# Altium PCB 20K Control Board V1.1.PcbDoc (part 16 of 24)
Units mm, origin at the board's own origin, x right, y up, seen from the top; angles counter-clockwise.
Board outline 132 x 260 mm, 4 copper layers (Top Layer, GND, VCC, Bottom Layer); 1384 components, 779 nets, 4515 pads, 1774 vias.
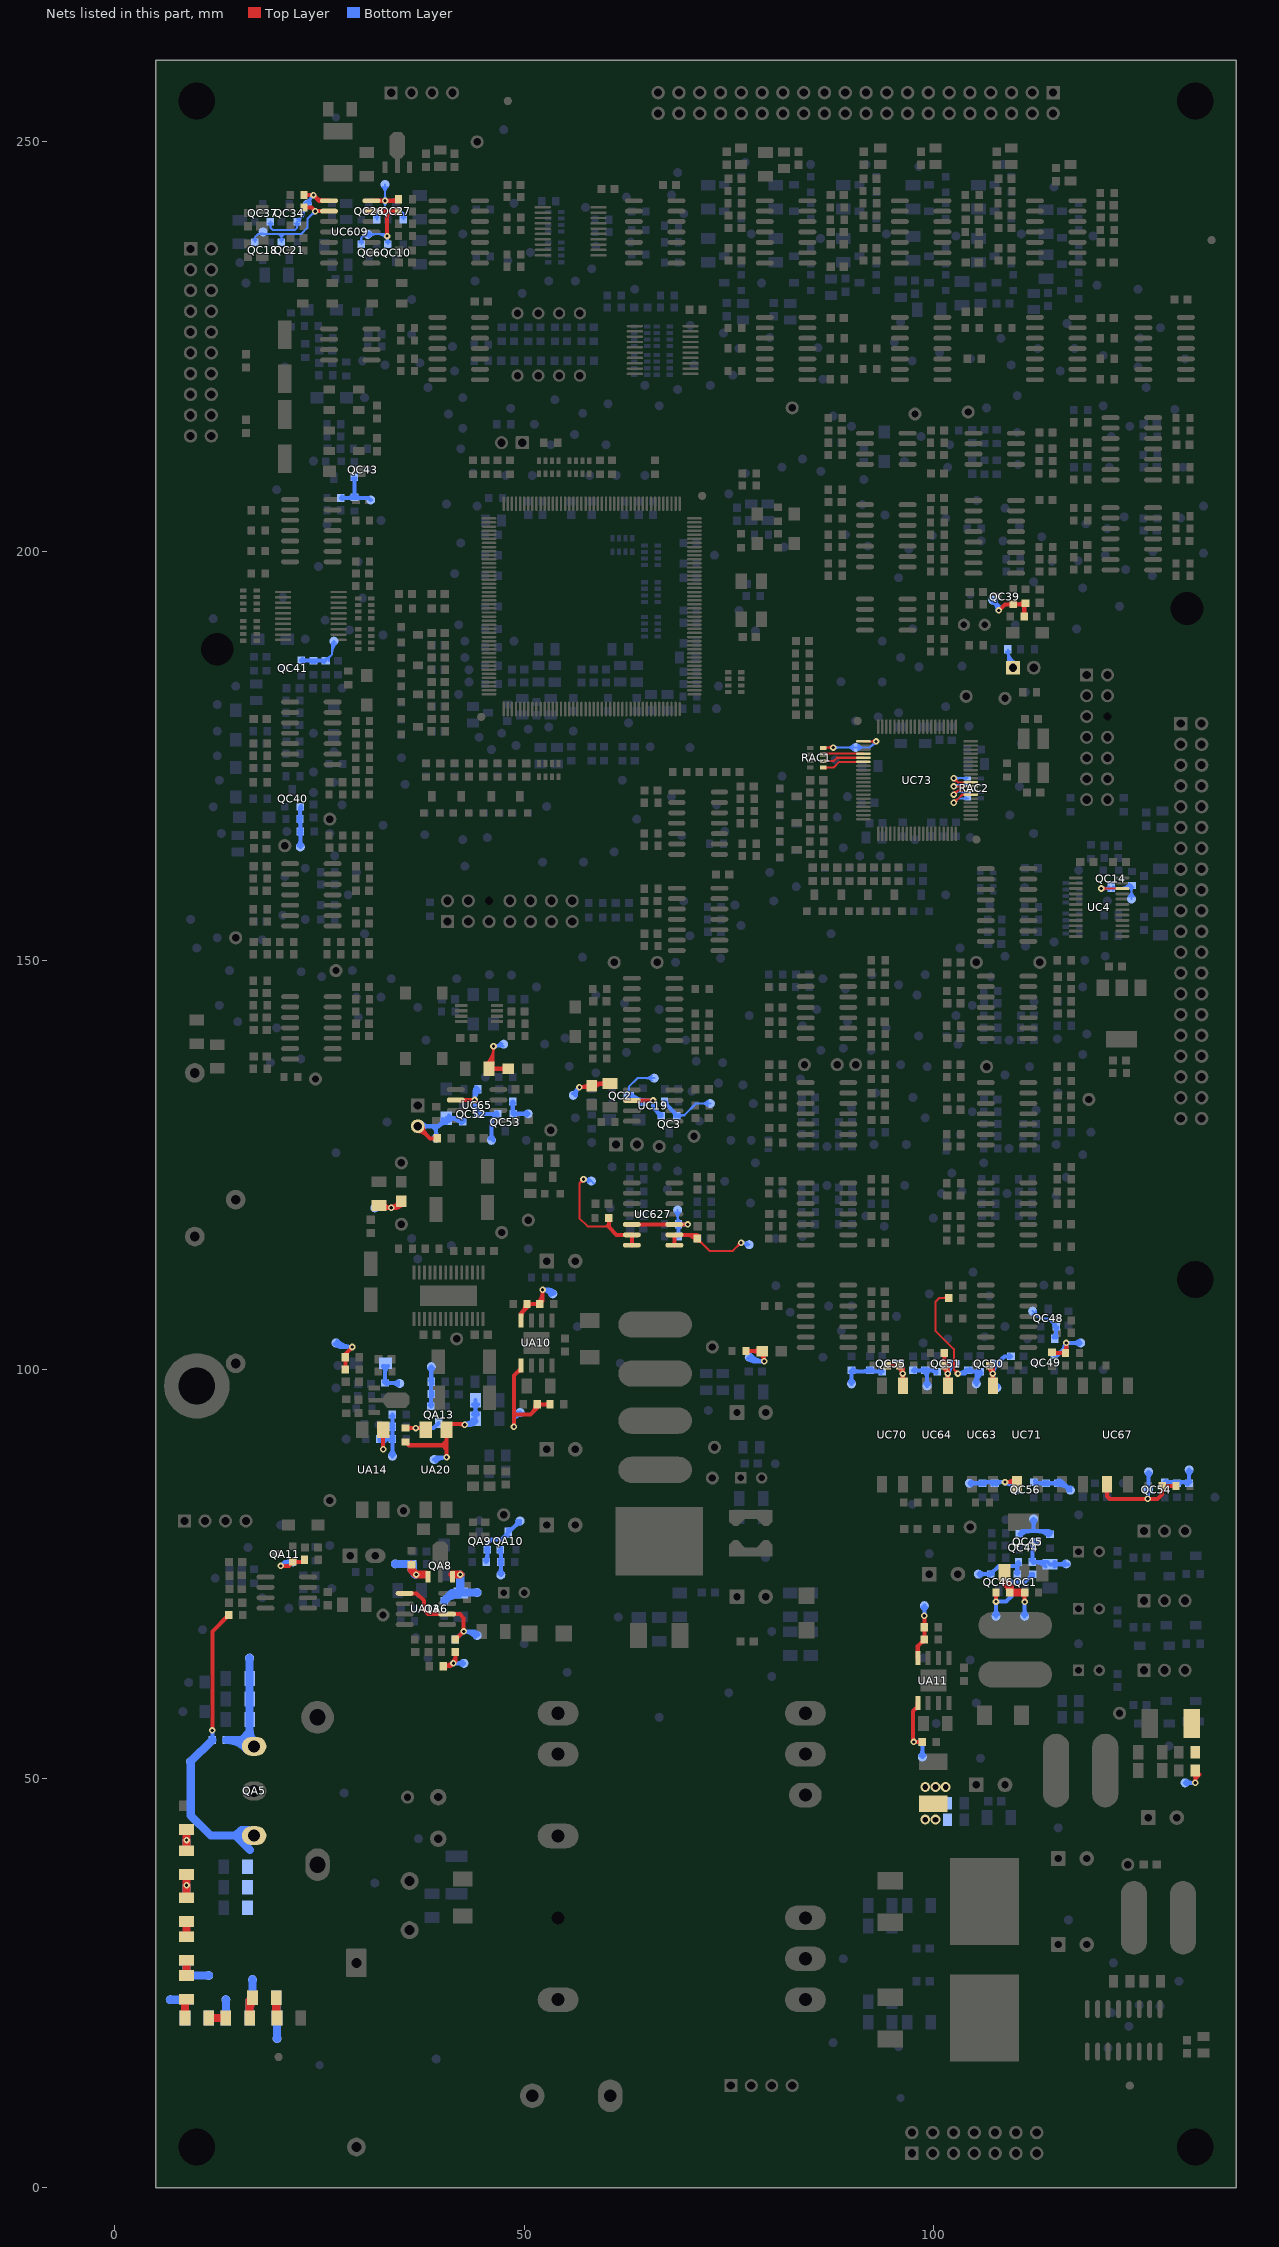
[diagram p18: the nets of this part, all layers, seen from the top]

## Via types
v1: diameter 0.8, hole 0.4, Top Layer to Bottom Layer, tented both sides, 1354 vias
v2: diameter 1.2, hole 0.7, Top Layer to Bottom Layer, 261 vias
v3: diameter 0.8, hole 0.4, Top Layer to Bottom Layer, 58 vias
v4: diameter 1.2, hole 0.7, Top Layer to Bottom Layer, tented top, 58 vias
v5: diameter 0.8, hole 0.4, Top Layer to Bottom Layer, tented top, 22 vias
v6: diameter 1.2, hole 0.7, Top Layer to Bottom Layer, tented both sides, 13 vias
v7: diameter 1.2, hole 0.7, Top Layer to Bottom Layer, tented bottom, 8 vias

## Nets (pads, with @x,y where several pads share a name; then routed paths per layer and width w, separated by ;. In a path a pad name is that pad's centre, name@x,y a point inside that pad or via, vN(x,y) a via of type N, cw(c..) or ccw(c..) an arc to the next point about the centre after c; other vN are vias at no path point) (continued)
NetDC58_2: DC58.2 JC1.2 pad.0 QC52.1 RC614.2 | length 23.4
  Top Layer w0.5: JC1.2@37,129.13 cw(c37,127.681) 38.024,128.706 cw(c39.049,129.73) JC1.2@37.6,129.73 ; JC1.2@37,129.73 38.48,128.25 RC614.2@39.4,128.25 ; RC614.2@39.259,128.109 ccw(c38.917,127.767) 38.917,128.25 ccw(c38.917,128.733) RC614.2@39.259,128.391
  Bottom Layer w0.5: JC1.2@37,129.73 39.25,129.73 ; JC1.2@37.424,129.306 cw(c38.449,128.281) 38.449,129.73 cw(c38.449,131.179) JC1.2@37.424,130.154 ; 38.77,129.73 39.25,129.25 ; pad.0@39.038,128.462 ccw(c38.526,128.974) 39.25,128.974 ccw(c39.974,128.974) pad.0@39.462,128.462 ; pad.0@39.25,128.25 39.25,129.25 ; 39.561,129.761 cw(c40.5,128.822) DC58.2@40.5,130.15 ; DC58.2@39.803,130.003 ccw(c39.205,130.6) DC58.2@40.05,130.6 ; DC58.2@40.818,130.382 cw(c41.586,129.614) 41.586,130.7 cw(c41.586,131.786) DC58.2@40.818,131.018 ; DC58.2@40.913,130.7 cw(c40.913,128.663) QC52.1@42.353,130.103 ; QC52.1@42.12,130.7 cw(c42.12,129.87) QC52.1@42.707,130.457 ; QC52.1@42.5,130.25 42.05,130.7 DC58.2@40.5,130.7 39.53,129.73 39.25,129.73 ; 39.25,129.25 39.25,129.73
NetFA2_2: FA2.2 LA11.2 LA18.2 pad.ICT@130.75,49.5 | length 6.1
  Top Layer w0.5: LA11.2@131.789,50.595 cw(c131.24,50.046) 132.016,50.046 cw(c132.792,50.046) LA11.2@132.243,50.595 ; v1@131.894,49.606 ccw(c131.599,49.901) 132.016,49.901 ; v1@132.016,49.516 132.016,50 ; LA11.2@132.016,51 132.016,50 ; LA11.2@132.516,50.5 132.016,50
  Bottom Layer w0.5: pad.ICT@130.75,49.5 v1(132,49.5) ; pad.ICT@130.962,49.288 cw(c131.474,48.776) 131.474,49.5 cw(c131.474,50.224) pad.ICT@130.962,49.712
NetFA3_2: FA3.2 LA15.2 LA20.2 pad.3@99.5,47.25
  other v2: 99,45 100.25,45 99,49 100.25,49 101.5,49
NetJC2_1: JC2.1 RC629.2 | length 11.2
  Bottom Layer w0.25: RC629.2@108.87,187.72 cw(c108.315,187.165) 109.1,187.165 cw(c109.885,187.165) RC629.2@109.33,187.72 ; JC2.1@109.1,186.339 ccw(c110.042,186.339) JC2.1@109.601,185.507 ; 109.1,186.755 ccw(c110.262,186.755) JC2.1@109.718,185.728 ; 109.1,187.17 ccw(c110.481,187.17) JC2.1@109.835,185.949 ; RC629.2@109.1,187.585 ccw(c110.701,187.585) JC2.1@109.952,186.17 ; JC2.1@109.73,185.75 109.1,186.38 RC629.2@109.1,188 ccw(c110.92,188) JC2.1@110.069,186.391
NetLDM1_2: LDM1.2 pad.ICT@56,133.5 RC204.2 | length 10
  Top Layer w0.5: v1(56.75,134.5) 57.75,134.5 57.925,134.675 LDM1.2@58.25,134.675 ; v1@56.983,134.5 ccw(c56.983,135.892) LDM1.2@57.967,134.908 ; 57.586,134.5 cw(c57.586,133.961) LDM1.2@57.967,134.342 ; LDM1.2@58.525,134.95 RC204.2@60.5,134.95 ; LDM1.2@58.533,134.442 cw(c59.759,133.216) RC204.2@59.759,134.95 ; RC204.2@59.967,134.667 ccw(c59.284,133.984) 59.284,134.95 ccw(c59.284,135.916) RC204.2@59.967,135.233
  Bottom Layer w0.5: pad.ICT@56,133.75 v1(56.75,134.5) ; pad.ICT@56.3,133.5 cw(c57.628,133.5) v1@56.689,134.439
NetLDM2_2: LDM2.2 pad.ICT@31.75,119.75 RC501.2 | length 12.3
  Top Layer w0.5: RC501.2@32.5,120.05 32.8,119.75 v1(33.75,119.75) ; RC501.2@32.841,120.259 ccw(c33.75,120.816) v1(33.75,119.75) ; v1@33.75,119.9 ccw(c33.75,121.288) LDM2.2@34.732,120.307 ; 34.232,119.807 cw(c35,119.039) LDM2.2@35,120.125 ; 34.282,119.75 ccw(c34.282,120.569) LDM2.2@35.1,120.519 ; LDM2.2@34.353,119.928 ccw(c33.755,120.525) LDM2.2@34.6,120.525 ; LDM2.2@34.601,120.55 cw(c33.75,120.602) v1(33.75,119.75) ; LDM2.2@35,120.575 34.175,119.75 v1(33.75,119.75)
  Bottom Layer w0.5: pad.ICT@31.75,119.75 v1(33.75,119.75) ; pad.ICT@31.962,119.538 cw(c32.474,119.026) 32.474,119.75 cw(c32.474,120.474) pad.ICT@31.962,119.962
NetLDM3_2: LDM3.2 pad.ICT@47.5,139.75 RC504.2 | length 20.1
  Top Layer w0.25: RC504.2@45.339,137.381 ccw(c43.331,139.5) 46.25,139.5 46.25,137.3 RC504.2@45.7,136.75 ; RC504.2@45.511,137.2 ccw(c43.882,138.918) 46.25,138.918 ; RC504.2@45.683,137.018 ccw(c44.433,138.337) 46.25,138.337 ; RC504.2@45.855,136.837 ccw(c44.984,137.756) 46.25,137.756 ; v1@46.056,139.306 cw(c45.586,138.836) 46.25,138.836 cw(c46.914,138.836) v1@46.444,139.306
  Top Layer w0.5: RC504.2@45.7,136.75 LDM3.2@47.825,136.75 ; RC504.2@45.983,136.467 cw(c46.666,135.784) 46.666,136.75 cw(c46.666,137.716) RC504.2@45.983,137.033 ; LDM3.2@47.742,136.467 ccw(c47.059,135.784) 47.059,136.75 ccw(c47.059,137.716) LDM3.2@47.742,137.033
  Bottom Layer w0.25: v1@46.444,139.306 cw(c46.914,138.836) 46.914,139.5 cw(c46.914,140.164) v1@46.444,139.694 ; 46.713,139.5 ccw(c46.713,140.266) pad.ICT@47.354,139.846 ; pad.ICT@47.145,139.983 cw(c46.25,140.57) v1(46.25,139.5) pad.ICT@47.5,139.5
NetLEDA1_1: LEDA1.1 pad.ICT@77.5,101.5 RA192.1 | length 11.5
  Top Layer w0.5: RA192.1@77.1,102.25 LEDA1.1@79.075,102.25 ; RA192.1@77.241,102.109 cw(c77.583,101.767) 77.583,102.25 cw(c77.583,102.733) RA192.1@77.241,102.391 ; LEDA1.1@78.742,101.967 ccw(c78.059,101.284) 78.059,102.25 ccw(c78.059,103.216) LEDA1.1@78.742,102.533 ; LEDA1.1@78.872,101.94 cw(c78.09,100.984) v1@79.325,100.984 ; v1(79.325,101) LEDA1.1@79.325,102.425
  Bottom Layer w0.5: pad.ICT@77.353,101.364 ccw(c78.184,102.131) 78.184,101 ; pad.ICT@77.5,101.5 78,101 v1(79.325,101) cw(c79.325,103.181) pad.ICT@77.721,101.703
NetQA5_1: pad.ICT@16.45,64.75 QA5.1 RA145.2 RA146.2 RA148.2 RA150.1 | length 23
  Bottom Layer w1: 15.704,54.75 cw(c15.704,53.18) QA5.1@16.921,54.171 ; QA5.1@16.146,53.54 ccw(c13.6,51.467) RA150.1@13.6,54.75 15.5,54.75 ; 16.45,55.7 15.5,54.75 ; 16.45,56.002 ccw(c18.702,56.002) QA5.1@17.11,54.41 ; pad.ICT@16.45,64.75 RA146.2@16.45,62.25 RA148.2@16.45,59.75 RA145.2@16.45,57.25 QA5.1@16.45,54.5 ; 15.5,54.75 16.2,54.75 QA5.1@17,53.95 ; QA5.1@16.45,54.5 QA5.1@17,53.95 ; QA5.1@16.45,54.5 QA5.1@17,53.95
NetQA5_3: pad.ICT@9.25,52.1 QA5.3 RA149.1 RA150.2 RA152.2 RA153.2 RA154.2 | length 45
  Top Layer w0.5: v1(11.9,55.9) 11.9,68 RA149.1@13.9,70
  Bottom Layer w0.5: RA150.2@11.759,54.941 ccw(c11.417,55.283) 11.9,55.283 ccw(c12.383,55.283) RA150.2@12.041,54.941 ; RA150.2@11.9,54.75 v1(11.9,55.9)
  Bottom Layer w1: RA150.2@11.9,54.75 pad.ICT@9.25,52.1 9.25,45.5 11.7,43.05 14.75,43.05 ; QA5.3@16.19,42.59 ccw(c15.081,41.481) 15.081,43.05 ccw(c15.081,44.619) QA5.3@16.19,43.51 ; QA5.3@16.3,43.75 15.45,43.75 14.75,43.05 ; 16.5,41.3 14.75,43.05 ; 14.75,43.05 QA5.3@17,43.05 14.75,43.05
NetQA6_1: pad.ICT@44.25,72.75 QA6.1 QA8.3 RA147.1 | length 10.1
  Top Layer w1: QA8.3@41.25,74.95 v1(42.2,74.95)
  Bottom Layer w1: QA6.1@40.25,71.75 41.2,72.7 RA147.1@42.25,72.7 ; QA6.1@40.378,71.878 cw(c42,70.257) RA147.1@42,72.55 ; 40.8,72.3 cw(c41.579,71.521) RA147.1@41.95,72.559 ; RA147.1@42.15,72.75 pad.ICT@44.25,72.75 ; RA147.1@42.2,73.3 v1(42.2,74.95)
NetQA8_1: pad.ICT@34.25,76.25 QA8.1 RA156.1 RA167.2 | length 8.1
  Top Layer w1: RA167.2@36.25,76.15 36.25,75.5 v1(36.8,74.95) QA8.1@38,74.95
  Bottom Layer w1: pad.ICT@34.25,76.25 RA156.1@36.4,76.25 36.4,75.35 v1(36.8,74.95) ; RA156.1@36.364,76.234 ccw(c36.81,75.81) 36.375,75.375 ; 36.4,75.674 ccw(c37.524,75.674) v1@36.729,74.879
NetQA9_1: pad.ICT@49.5,81.497 QA9.1 QA10.3 RA165.2 | length 12.6
  Bottom Layer w0.5: RA165.2@45.209,76.691 ccw(c44.505,77.395) 45.5,77.395 ; RA165.2@45.35,76.5 RA165.2@45.35,76.65 ; QA9.1@45.353,77.853 cw(c45,77.5) 45.5,77.5 cw(c46,77.5) QA9.1@45.647,77.853 ; QA9.1@45.353,78.147 ccw(c45,78.5) 45.5,78.5 ccw(c46,78.5) QA9.1@45.647,78.147 ; RA165.2@45.5,76.65 QA9.1@45.5,78 45.5,78.75 46,79.25 47.25,79.25 48.035,80.035 QA10.3@48.035,80.282 ; 47.373,79.373 cw(c48.035,78.711) QA10.3@48.035,79.647 ; QA10.3@48.035,80.032 pad.ICT@49.5,81.497 ; QA10.3@48.035,80.417 ccw(c48.035,81.346) 48.692,80.689 ; pad.ICT@49.2,81.497 cw(c48.476,81.497) 48.988,80.985 cw(c49.5,80.473) pad.ICT@49.5,81.197
NetQA10_2: pad.ICT@47.15,74.9 QA10.2 RA169.2 | length 6.5
  Bottom Layer w0.5: pad.ICT@46.938,75.112 ccw(c46.426,75.624) 47.15,75.624 ccw(c47.874,75.624) pad.ICT@47.362,75.112 ; QA10.2@46.948,77.853 cw(c46.462,77.367) 47.15,77.367 ; RA169.2@47.009,76.309 cw(c46.667,75.967) 47.15,75.967 cw(c47.633,75.967) RA169.2@47.291,76.309 ; RA169.2@47.009,76.691 ccw(c46.667,77.033) 47.15,77.033 ccw(c47.633,77.033) RA169.2@47.291,76.691 ; pad.ICT@47.15,74.9 RA169.2@47.15,76.5 QA10.2@47.15,78.195
NetQA11_1: pad.4@21.75,76.5 QA11.1 RA183.2 | length 6.1
  Top Layer w0.5: v1(20.25,76) 21.25,76 QA11.1@21.75,76.5 22.9,76.5 RA183.2@23.15,76.75
  Bottom Layer w0.5: v1(20.25,76) 20.75,76.5 pad.4@21.75,76.5 ; pad.4@21.538,76.288 ccw(c21.026,75.776) 21.026,76.5 ccw(c21.026,77.224) pad.4@21.538,76.712
NetQA13_2: pad.ICT@38.65,100.35 QA13.2 RA187.2 RA188.2 | length 10.2
  Bottom Layer w0.5: QA13.2@38.448,95.647 ccw(c38.095,96) 38.595,96 ccw(c39.095,96) QA13.2@38.742,95.647 ; RA187.2@38.509,98.691 ccw(c38.167,99.033) 38.65,99.033 ccw(c39.133,99.033) RA187.2@38.791,98.691 ; QA13.2@38.595,95.5 RA187.2@38.595,98.445 ; 38.595,96.334 cw(c39.266,96.334) RA188.2@38.791,96.809 ; 38.595,97.666 ccw(c39.266,97.666) RA188.2@38.791,97.191 ; 38.595,97.834 cw(c39.266,97.834) RA187.2@38.791,98.309 ; RA187.2@38.65,98.5 pad.ICT@38.65,100.35 ; 38.65,99.626 cw(c39.374,99.626) 38.862,100.138 ccw(c39.374,99.626) 38.65,99.626 ; 38.65,99.626 ccw(c37.926,99.626) 38.438,100.138 cw(c37.926,99.626) 38.65,99.626
NetQA13_3: pad.ICT@38,92.85 QA13.3 RA204.1 UA20.2 | length 7.6
  Top Layer w0.5: RA204.1@35.5,92.85 UA20.2@37.78,92.85
  Bottom Layer w0.5: v1(36.75,92.85) 38.942,92.85 QA13.3@39.56,93.468 ; pad.ICT@37.788,92.638 ccw(c37.276,92.126) 37.276,92.85 ccw(c37.276,93.574) pad.ICT@37.788,93.062 ; pad.ICT@38.212,92.638 cw(c38.724,92.126) 38.724,92.85 cw(c38.724,93.574) pad.ICT@38.212,93.062
NetQC1_1: pad.ICT@105.5,75 QC1.1 QC46.1 RC49.2 | length 11
  Bottom Layer w0.5: pad.ICT@105.5,75 QC46.1@107,75 108,76 RC49.2@110.25,76 ; pad.ICT@105.712,74.788 cw(c106.224,74.276) 106.224,75 cw(c106.224,75.724) pad.ICT@105.712,75.212 ; QC46.1@106.853,74.853 ccw(c106.5,74.5) 106.5,75 ccw(c106.5,75.5) QC46.1@106.853,75.147 ; QC46.1@107,75.207 ccw(c107,75.707) 107.354,75.354 ccw(c107.707,75) QC46.1@107.207,75 ; QC1.1@110.103,75.147 ccw(c109.75,75.5) 110.25,75.5 ccw(c110.75,75.5) QC1.1@110.397,75.147 ; QC1.1@110.25,75 RC49.2@110.25,76 ; 110.25,75.605 cw(c111.245,75.605) RC49.2@110.541,76.309 ; RC49.2@110.4,76.5 110.25,76.35 RC49.2@110.25,76
NetQC1_2: pad.ICT@107.65,69.85 QC1.2 QC46.2 RC77.1 | length 15
  Top Layer w0.5: RC77.1@107.509,72.559 cw(c107.167,72.217) 107.65,72.217 cw(c108.133,72.217) RC77.1@107.791,72.559 ; v1(107.65,71.65) RC77.1@107.65,72.75
  Bottom Layer w0.5: pad.ICT@107.438,70.062 ccw(c106.926,70.574) 107.65,70.574 ccw(c108.374,70.574) pad.ICT@107.862,70.062 ; pad.ICT@107.65,69.85 v1(107.65,71.65) 108.9,71.65 109.575,72.325 109.575,73.75 ; QC46.2@108.905,75 108.905,74.723 109.575,74.053 ; QC46.2@109.112,74.996 ccw(c110.222,74.976) 109.437,74.191 ; 109.879,74.053 109.575,73.75 ; QC1.2@111.948,75 cw(c111.448,75) 111.801,74.646 cw(c112.155,74.293) QC1.2@112.155,74.793 ; QC1.2@112.155,75 111.208,74.053 109.575,74.053 ; 109.575,73.75 109.575,74.053
NetQC2_3: pad.ICT@65.9,135.6 QC2.3 QC3.1 RC208.2 UC19.2 | length 21.8
  Top Layer w0.5: UC19.2@63.15,132.885 v1(65.75,132.885)
  Bottom Layer w0.25: QC2.3@62.547,133.7 ccw(c61.98,134.267) 62.782,134.267 ccw(c63.584,134.267) QC2.3@63.017,133.7 ; QC2.3@62.782,133.465 62.782,134.532 63.85,135.6 pad.ICT@65.9,135.6 ; pad.ICT@65.599,135.299 ccw(c64.874,134.574) 64.874,135.6 ccw(c64.874,136.626) pad.ICT@65.599,135.901
  Bottom Layer w0.5: QC2.3@62.753,133.258 ccw(c63.654,134.159) 63.654,132.885 ; QC2.3@62.782,133.465 63.362,132.885 v1(65.75,132.885) 65.75,132 QC3.1@66.75,131 ; QC2.3@63.106,133.612 ccw(c64.861,135.366) RC208.2@64.861,132.885 ; QC2.3@63.159,133.409 ccw(c63.588,133.289) 63.273,132.974 ; 63.4,132.885 cw(c63.4,131.6) RC208.2@64.309,132.509 ; RC208.2@64.691,132.509 cw(c65.6,131.6) v1@65.6,132.885 ; QC3.1@66.543,131 ccw(c66.043,131) 66.396,131.354 ccw(c66.75,131.707) QC3.1@66.75,131.207
NetQC3_2: pad.ICT@72.75,132.5 QC3.2 RC213.1 | length 11.1
  Bottom Layer w0.25: QC3.2@68.655,131 68.725,131.07 69.57,131.07 ; QC3.2@68.89,131.235 ccw(c69.288,131.633) 69.288,131.07 ; QC3.2@68.9,130.775 cw(c69.57,130.16) 69.57,131.07 ; pad.ICT@72.449,132.199 ccw(c71.724,131.474) 71.724,132.5 ccw(c71.724,133.526) pad.ICT@72.449,132.801 ; pad.ICT@72.75,132.5 71,132.5 69.57,131.07
  Bottom Layer w0.5: RC213.1@67.15,132.75 67.15,132.6 QC3.2@68.75,131 ; RC213.1@67.35,132.7 ccw(c68.074,132.7) 67.562,132.188 ; 68.234,131.516 cw(c67.718,131) QC3.2@68.448,131
NetQC6_1: pad.ICT@30.9,238.7 QC6.1 QC10.1 RC349.1 UC609.13 | length 24.3
  Top Layer w0.5: UC609.13@31.35,241.54 33.25,241.54 ; 32.75,241.5 33.25,241 ; v1(33.25,238.5) 33.25,241 ; 33.79,241.54 33.25,241 ; 34.143,241.54 ccw(c34.143,242.057) RC349.1@34.509,241.691 ; 34.191,241.54 cw(c34.191,241.091) RC349.1@34.509,241.409 ; RC349.1@34.65,241.25 34.36,241.54 33.25,241.54 ; 33.25,241 33.25,241.54
  Bottom Layer w0.25: QC6.1@29.86,237.735 ccw(c29.293,238.302) 30.095,238.302 ccw(c30.897,238.302) QC6.1@30.33,237.735 ; QC6.1@30.095,237.5 30.095,238.345 30.5,238.75 v1@33.25,238.75 ; 30.173,238.38 cw(c30.661,237.555) pad.ICT@31.032,238.439 ; 30.246,238.496 cw(c30.816,237.926) pad.ICT@31.129,238.669 ; pad.ICT@30.509,238.759 cw(c30.972,238.296) pad.ICT@31.226,238.9 ; pad.ICT@30.836,238.476 cw(c31.496,237.815) 31.496,238.75 ; pad.ICT@31.012,238.299 cw(c32.1,237.212) 32.1,238.75 ; pad.ICT@31.012,238.901 ccw(c31.376,239.264) pad.ICT@31.376,238.75 ; 31.983,238.75 cw(c31.983,237.233) 33.056,238.306 cw(c32.357,237.607) QC10.1@33.345,237.607 ; 32.586,238.75 cw(c32.586,237.836) v1@33.232,238.482 ; QC10.1@33.11,237.735 ccw(c32.543,238.302) 33.345,238.302 ccw(c34.147,238.302) QC10.1@33.58,237.735 ; QC10.1@33.345,237.5 v1@33.345,238.5 ; 33.345,238.065 cw(c33.685,238.065) v1@33.444,238.306
NetQC14_3: pad.ICT@124.2,157.5 QC14.3 RC359.1 UC4.22 | length 19.3
  Top Layer w0.25: v1(120.525,158.775) UC4.22@123.1,158.775 ; v1@120.719,158.581 cw(c121.189,158.111) 121.189,158.775 cw(c121.189,159.439) v1@120.719,158.969
  Bottom Layer w0.25: v1(120.525,158.775) 123.875,158.775 RC359.1@124.25,159.15 RC359.1@124.068,158.968 ; v1@120.719,158.581 cw(c121.189,158.111) 121.189,158.775 cw(c121.189,159.439) v1@120.719,158.969 ; v1@120.876,158.775 ccw(c120.876,159.629) QC14.3@121.48,159.025 ; 120.95,158.775 cw(c120.95,158.025) QC14.3@121.48,158.555 ; QC14.3@121.95,158.555 cw(c122.481,158.025) 122.481,158.775 ; QC14.3@121.95,159.025 ccw(c122.554,159.629) 122.554,158.775 ; 122.51,158.775 ccw(c122.51,160.84) RC359.1@123.97,159.38 ; 123.114,158.775 ccw(c123.114,160.236) RC359.1@124.147,159.203 ; 123.717,158.775 ccw(c123.717,159.633) RC359.1@124.324,159.026
  Bottom Layer w0.254: pad.ICT@123.901,157.799 ccw(c123.179,158.521) 124.2,158.521 ccw(c125.221,158.521) pad.ICT@124.499,157.799 ; RC359.1@123.972,158.922 cw(c123.42,158.37) 124.2,158.37 cw(c124.98,158.37) RC359.1@124.428,158.922 ; pad.ICT@124.2,157.5 RC359.1@124.2,159.183
NetQC18_1: pad.ICT@18.1,239 QC18.1 QC21.1 RC363.1 UC609.2 | length 19.3
  Top Layer w0.5: RC363.1@23.1,242 24,242 v1(24.46,241.54) UC609.2@26.15,241.54 ; RC363.1@23.241,241.859 cw(c23.583,241.517) 23.583,242 cw(c23.583,242.483) RC363.1@23.241,242.141
  Bottom Layer w0.25: QC18.1@16.921,238.033 ccw(c16.728,238.345) 17.095,238.345 ; QC18.1@17.095,237.75 17.095,238.345 ; QC18.1@17.269,238.033 cw(c17.462,238.345) 17.095,238.345 ; 17.294,238.544 cw(c17.986,237.851) pad.ICT@18.083,238.826 ; QC21.1@20.149,238.018 ccw(c19.865,238.405) 20.345,238.405 ; QC21.1@20.345,237.75 20.345,238.405 ; 20.345,238.595 20.345,238.405 ; QC21.1@20.541,238.018 cw(c20.825,238.405) 20.345,238.405 ; 20.69,238.75 20.345,238.405 ; v1@24.185,241.54 cw(c23.521,241.54) 23.991,241.071 cw(c24.46,240.601) v1@24.46,241.265 ; v1(24.46,241.54) 23.5,240.58 23.5,239.5 22.75,238.75 20,238.75 ; 17.095,238.345 17.5,238.75 20,238.75 ; 20,238.75 20.345,238.405
NetQC26_1: pad.ICT@33,244.8 QC26.1 QC27.1 RC374.1 UC609.14 | length 19
  Top Layer w0.5: UC609.14@31.35,242.81 v1(33,242.81) RC374.1@34.65,242.81 ; 33.829,242.81 ccw(c33.829,243.771) RC374.1@34.509,243.091
  Bottom Layer w0.25: QC26.1@31.777,240.746 ccw(c31.32,241.25) 32,241.25 ; QC26.1@32,240.5 32,241.25 ; QC26.1@32.223,240.746 cw(c32.68,241.25) 32,241.25 ; pad.ICT@32.699,244.499 cw(c31.974,243.774) 33,243.774 cw(c34.026,243.774) pad.ICT@33.301,244.499 ; 32.75,241.5 33,241.75 ; v1@32.806,242.616 cw(c32.336,242.146) 33,242.146 cw(c33.664,242.146) v1@33.194,242.616 ; v1@32.806,243.004 ccw(c32.336,243.474) 33,243.474 ccw(c33.664,243.474) v1@33.194,243.004 ; pad.ICT@33,244.8 v1(33,242.81) 33,241.75 ; 33.25,241.5 33,241.75 ; QC27.1@35.027,240.746 ccw(c34.57,241.25) 35.25,241.25 ; QC27.1@35.25,240.5 35.25,241.25 ; QC27.1@35.473,240.746 cw(c35.93,241.25) 35.25,241.25 ; 32,241.25 32.25,241.5 33,241.5 ; 33,241.5 35,241.5 35.25,241.25 ; 33,241.5 33,241.75
NetQC34_1: pad.ICT@23.5,242.4 QC34.1 QC37.1 RC386.1 UC609.1 | length 24.7
  Top Layer w0.5: RC386.1@23.1,243.5 v1(24.25,243.5) 24.94,242.81 UC609.1@26.15,242.81 ; RC386.1@23.241,243.359 cw(c23.583,243.017) 23.583,243.5 cw(c23.583,243.983) RC386.1@23.241,243.641 ; 24.565,243.185 ccw(c25.35,243.971) UC609.1@25.35,242.86
  Bottom Layer w0.25: QC37.1@18.777,240.004 cw(c18.32,239.5) 19,239.5 ; QC37.1@19,240.25 19,239.5 ; QC37.1@19.223,240.004 ccw(c19.68,239.5) 19,239.5 ; QC34.1@22.027,240.004 cw(c21.57,239.5) 22.25,239.5 ; QC34.1@22.25,240.582 ccw(c22.25,241.384) 22.817,240.817 ccw(c23.384,240.25) QC34.1@22.582,240.25 ; QC34.1@22.473,240.004 ccw(c22.93,239.5) 22.25,239.5 ; 23,240.913 cw(c24.232,240.913) pad.ICT@23.688,242.019 ; 23,241.315 cw(c24.034,241.315) pad.ICT@23.577,242.243 ; 23,241.717 cw(c23.836,241.717) pad.ICT@23.467,242.467 ; 23,242.119 cw(c23.638,242.119) pad.ICT@23.356,242.692 ; pad.ICT@23.673,242.429 cw(c24.497,242.565) 23.906,243.156 ; pad.ICT@23.919,242.47 cw(c25.087,242.663) v1(24.25,243.5) 23,242.25 23,241 QC34.1@22.25,240.25 22.25,239.5 ; v1@23.975,243.5 cw(c23.311,243.5) 23.781,243.031 cw(c24.25,242.561) v1@24.25,243.225 ; 19,239.5 19.25,239.25 22,239.25 22.25,239.5
NetQC39_1: pad.ICT@107.25,194 QC39.1 RC462.1 RC469.1 | length 12.6
  Top Layer w0.5: v1(108,192.75) 108.75,193.5 QC39.1@109.75,193.5 111.1,193.5 RC462.1@111.1,192 ; QC39.1@109.603,193.353 ccw(c109.25,193) 109.25,193.5 ccw(c109.25,194) QC39.1@109.603,193.647 ; QC39.1@109.897,193.353 cw(c110.25,193) 110.25,193.5 cw(c110.25,194) QC39.1@109.897,193.647 ; 110.355,193.5 ccw(c110.355,194.495) RC469.1@111.059,193.791 ; RC462.1@110.959,192.191 ccw(c110.617,192.533) 111.1,192.533 ccw(c111.583,192.533) RC462.1@111.241,192.191 ; 111.1,192.926 cw(c111.924,192.926) RC469.1@111.341,193.509
  Bottom Layer w0.5: pad.ICT@107.25,193.7 cw(c107.25,192.976) 107.762,193.488 cw(c108.274,194) pad.ICT@107.55,194 ; pad.ICT@107.25,194 108,193.25 v1(108,192.75) ; pad.ICT@107.39,193.86 cw(c106.281,192.75) v1@107.85,192.75
NetQC40_2: pad.ICT@22.65,163.85 QC40.2 RC457.1 RC466.2 | length 10
  Bottom Layer w0.5: pad.ICT@22.438,164.062 ccw(c21.926,164.574) 22.65,164.574 ccw(c23.374,164.574) pad.ICT@22.862,164.062 ; RC466.2@22.459,167.059 cw(c21.996,166.596) 22.65,166.596 ; RC466.2@22.459,167.441 ccw(c22.117,167.783) 22.6,167.783 ccw(c23.083,167.783) RC466.2@22.741,167.441 ; RC457.1@22.509,165.559 cw(c22.167,165.217) 22.65,165.217 cw(c23.133,165.217) RC457.1@22.791,165.559 ; RC457.1@22.509,165.941 ccw(c22.167,166.283) 22.65,166.283 ccw(c23.133,166.283) RC457.1@22.791,165.941 ; RC466.2@22.6,167.25 22.6,168.695 QC40.2@22.755,168.85 ; 22.6,168.117 cw(c23.288,168.117) QC40.2@22.802,168.603 ; pad.ICT@22.65,163.85 RC457.1@22.65,165.75 RC466.2@22.65,167.7
NetQC41_2: pad.ICT@26.75,189 QC41.2 RC460.1 RC467.2 | length 11.8
  Bottom Layer w0.25: RC460.1@25.75,186.6 26.5,187.35 26.5,188.75 pad.ICT@26.75,189 ; RC460.1@25.8,186.925 ccw(c25.8,187.589) 26.269,187.119 ; RC460.1@26.125,186.6 cw(c27.03,186.6) 26.39,187.24 ; 26.5,187.37 cw(c28.38,187.37) pad.ICT@27.051,188.699 ; 26.5,187.974 cw(c27.776,187.974) pad.ICT@26.874,188.876
  Bottom Layer w0.5: QC41.2@22.75,186.655 RC460.1@25.695,186.655 ; QC41.2@22.897,186.508 cw(c23.25,186.155) 23.25,186.655 cw(c23.25,187.155) QC41.2@22.897,186.802 ; 23.584,186.655 cw(c23.584,185.984) RC467.2@24.059,186.459 ; RC467.2@24.441,186.459 cw(c24.916,185.984) 24.916,186.655 ; 25.084,186.655 cw(c25.084,185.984) RC460.1@25.559,186.459
NetQC43_1: pad.ICT@31.25,206.25 QC43.1 RC494.2 RC495.1 | length 11.9
  Bottom Layer w0.5: RC495.1@27.6,206.5 RC494.2@29.15,206.5 ; RC495.1@27.741,206.359 cw(c28.083,206.017) 28.083,206.5 cw(c28.083,206.983) RC495.1@27.741,206.641 ; QC43.1@29.25,208.853 RC494.2@29.25,206.6 RC494.2@29.15,206.5 ; RC494.2@29.441,206.741 ccw(c30.024,207.324) 30.024,206.5 ; pad.ICT@31.25,206.25 31,206.5 RC494.2@29.15,206.5 ; 29.25,207.083 ccw(c29.733,207.083) 29.391,206.741 cw(c29.733,207.083) 29.25,207.083 ; 29.25,207.083 cw(c28.767,207.083) 29.109,206.741 ccw(c28.767,207.083) 29.25,207.083 ; 29.25,208.5 ccw(c28.75,208.5) 29.103,208.853 cw(c28.75,208.5) 29.25,208.5 ; 29.25,208.5 cw(c29.75,208.5) 29.397,208.853 ccw(c29.75,208.5) 29.25,208.5 ; 28.476,206.5 ccw(c28.476,207.324) 29.059,206.741 cw(c28.476,207.324) 28.476,206.5
NetQC44_1: pad.ICT@111.15,69.85 QC44.1 RC77.2 RC80.2 | length 11.3
  Top Layer w0.5: RC80.2@111.009,72.559 cw(c110.667,72.217) 111.15,72.217 cw(c111.633,72.217) RC80.2@111.291,72.559 ; v1(111.15,71.6) RC80.2@111.15,72.75
  Top Layer w1: QC44.1@108.7,75.15 108.7,74.05 109.35,73.4 RC77.2@109.35,72.75 RC80.2@111.15,72.75 ; QC44.1@108.9,74.675 ccw(c109.442,74.267) 108.962,73.788 ; 109.011,73.739 cw(c108.072,72.8) RC77.2@109.4,72.8
  Bottom Layer w0.5: pad.ICT@110.938,70.062 ccw(c110.426,70.574) 111.15,70.574 ccw(c111.874,70.574) pad.ICT@111.362,70.062 ; pad.ICT@111.15,69.85 v1(111.15,71.6)
NetQC45_2: pad.ICT@112.25,81.75 QC45.2 RC86.2 | length 10.9
  Bottom Layer w0.5: QC45.2@110.5,79.905 110.845,80.25 113.85,80.25 RC86.2@114.25,79.85 ; QC45.2@110.647,79.758 cw(c111.833,78.572) 111.833,80.25 ; 111.5,80.25 112,80.25 112.25,80.5 ; pad.ICT@112.038,81.538 cw(c111.526,81.026) 112.25,81.026 cw(c112.974,81.026) pad.ICT@112.462,81.538 ; pad.ICT@112.25,81.75 112.25,80.5 ; 112.5,80.25 112.25,80.5 ; 112.751,80.25 cw(c112.751,78.401) RC86.2@114.059,79.709 ; RC86.2@113.959,80.25 cw(c113.959,79.609) RC86.2@114.412,80.062
NetQC45_3: pad.ICT@116.25,76.25 QC45.3 RC47.1 RC49.1 | length 13.9
  Bottom Layer w0.5: RC49.1@111.959,76.691 ccw(c111.617,77.033) 112.1,77.033 ccw(c112.583,77.033) RC49.1@112.241,76.691 ; 112.1,77.851 cw(c113.468,77.851) QC45.3@112.501,78.819 ; RC49.1@112.241,76.359 cw(c112.583,76.017) 112.583,76.5 cw(c112.583,76.983) RC49.1@112.241,76.641 ; RC49.1@112.31,76.5 cw(c112.31,74.51) RC47.1@113.717,75.917 ; QC45.3@112.532,78.965 112.1,78.533 RC49.1@112.1,76.5 113.95,76.5 RC47.1@114.25,76.2 pad.ICT@116.45,76.2 ; RC47.1@114.783,75.917 cw(c115.466,75.234) 115.466,76.2 cw(c115.466,77.166) RC47.1@114.783,76.483 ; 115.405,76.2 ccw(c115.405,77.095) pad.ICT@116.038,76.462 ; 115.646,76.2 cw(c115.646,75.646) pad.ICT@116.038,76.038
NetQC48_1: pad.ICT@112.125,107.125 QC48.1 RC600.2 | length 9.7
  Bottom Layer w0.25: pad.ICT@112.125,106.7 cw(c112.125,105.674) 112.851,106.399 cw(c113.576,107.125) pad.ICT@112.55,107.125 ; pad.ICT@112.125,107.125 113,106.25 114,106.25 QC48.1@115,105.25 ; QC48.1@114.668,105.25 ccw(c113.866,105.25) 114.433,105.817 ccw(c115,106.384) QC48.1@115,105.582
  Bottom Layer w0.5: RC600.2@114.709,103.941 ccw(c114.005,104.645) 115,104.645 ; QC48.1@114.85,105.1 QC48.1@115,105.25 RC600.2@115,103.9 ; QC48.1@114.853,105.103 cw(c114.5,104.75) 115,104.75 cw(c115.5,104.75) QC48.1@115.147,105.103
NetQC49_1: pad.ICT@118,103.25 QC49.1 RC602.2 RC609.2 | length 12.6
  Top Layer w0.5: RC609.2@114.6,102 RC602.2@116.15,102 ; RC609.2@114.691,102.241 ccw(c115.274,102.824) 115.274,102 ; RC602.2@116.009,101.859 ccw(c115.667,101.517) 115.667,102 ccw(c115.667,102.483) RC602.2@116.009,102.141 ; RC602.2@116.009,102.191 ccw(c115.426,102.774) 116.25,102.774 ; RC602.2@116.25,102.1 v1(116.25,103.25)
  Bottom Layer w0.5: QC49.1@114.75,101.75 115.25,101.75 116.25,102.75 v1(116.25,103.25) pad.ICT@118,103.25 ; QC49.1@114.75,101.957 ccw(c114.75,103.665) 115.957,102.457 ; 115.64,102.14 ccw(c114.531,103.25) v1@116.1,103.25 ; pad.ICT@117.788,103.038 ccw(c117.276,102.526) 117.276,103.25 ccw(c117.276,103.974) pad.ICT@117.788,103.462
NetQC50_1: pad.ICT@105.25,98.25 QC50.1 RC604.1 RC612.2 | length 24.8
  Top Layer w0.25: RC604.1@101.67,108.52 ccw(c101.115,107.965) 101.115,108.75 ccw(c101.115,109.535) RC604.1@101.67,108.98 ; RC604.1@101.9,108.75 100.75,108.75 100.25,108.25 100.25,104.75 102.5,102.5 102.5,100 v1(103,99.5) ; v1@102.725,99.5 ccw(c102.061,99.5) 102.531,99.969 ccw(c103,100.439) v1@103,99.775
  Bottom Layer w0.5: RC612.2@104.04,100.02 cw(c103,100.8) v1(103,99.5) 103.85,99.5 RC612.2@104.25,99.9 104.4,99.75 QC50.1@105.75,99.75 ; RC612.2@104.441,100.041 ccw(c105.145,100.745) 105.145,99.75 ; pad.ICT@105.038,98.462 ccw(c104.526,98.974) 105.25,98.974 ccw(c105.974,98.974) pad.ICT@105.462,98.462 ; pad.ICT@105.25,98.169 cw(c107.164,98.169) QC50.1@105.888,99.596 ; pad.ICT@105.25,98.25 105.25,99.75 ; 105.25,99.287 cw(c106.164,99.287) QC50.1@105.555,99.968 ; QC50.1@105.603,99.603 ccw(c105.25,99.25) 105.25,99.75 ccw(c105.25,100.25) QC50.1@105.603,99.897
NetQC50_3: pad.ICT@107.75,97.75 QC50.3 RC594.1 RC601.2 UC63.1 | length 16.9
  Top Layer w0.5: RC601.2@106.709,100.309 cw(c105.353,98.953) UC63.1@107.27,98.953 ; RC601.2@106.85,100.5 107.27,100.08 UC63.1@107.27,98 ; UC63.1@107.023,98.647 ccw(c106.425,99.245) 107.27,99.245 ccw(c108.115,99.245) UC63.1@107.517,98.647 ; RC601.2@107.062,100.662 cw(c106.56,100.16) RC601.2@107.27,100.16
  Bottom Layer w0.5: 107.27,98.378 ccw(c108.315,98.378) pad.ICT@107.616,97.601 ; v1@107.27,99.455 cw(c108.8,99.455) QC50.3@107.747,100.565 ; pad.ICT@107.75,97.75 107.27,98.23 v1(107.27,99.5) ; pad.ICT@107.951,97.973 cw(c109.323,99.5) v1(107.27,99.5) ; QC50.3@108.167,100.715 cw(c109.096,100.715) 108.439,101.372 ; RC594.1@109.309,101.459 ccw(c108.967,101.117) 108.967,101.6 ccw(c108.967,102.083) RC594.1@109.309,101.741 ; RC594.1@109.5,101.6 108.667,101.6 QC50.3@107.782,100.715 107.27,100.203 v1(107.27,99.5)
NetQC51_1: pad.ICT@99.23,98 QC51.1 RC606.2 RC613.2 | length 9.9
  Bottom Layer w0.5: RC606.2@97.5,99.9 QC51.1@100.35,99.9 ; RC606.2@97.691,99.759 cw(c98.033,99.417) 98.033,99.9 cw(c98.033,100.383) RC606.2@97.691,100.041 ; RC613.2@98.809,99.759 ccw(c98.467,99.417) 98.467,99.9 ccw(c98.467,100.383) RC613.2@98.809,100.041 ; RC613.2@98.909,99.759 cw(c98.133,98.983) 99.23,98.983 ; RC613.2@99,99.9 99.23,99.67 pad.ICT@99.23,98 ; pad.ICT@99.018,98.212 ccw(c98.506,98.724) 99.23,98.724 ccw(c99.954,98.724) pad.ICT@99.442,98.212 ; RC613.2@99.191,99.759 cw(c99.533,99.417) 99.533,99.9 cw(c99.533,100.383) RC613.2@99.191,100.041 ; 99.638,99.9 cw(c99.638,98.888) QC51.1@100.353,99.603
NetQC51_3: pad.ICT@101.75,98 QC51.3 RC597.1 RC603.2 UC64.1 | length 15.8
  Top Layer w0.5: RC603.2@101.209,100.309 cw(c99.853,98.953) UC64.1@101.77,98.953 ; RC603.2@101.209,100.691 ccw(c100.867,101.033) 101.35,101.033 ccw(c101.833,101.033) RC603.2@101.491,100.691 ; RC597.1@101.209,101.809 cw(c100.867,101.467) 101.35,101.467 cw(c101.833,101.467) RC597.1@101.491,101.809 ; RC597.1@101.35,102 RC603.2@101.35,100.5 101.77,100.08 UC64.1@101.77,98 ; UC64.1@101.523,98.647 ccw(c100.925,99.245) 101.77,99.245 ccw(c102.615,99.245) UC64.1@102.017,98.647 ; RC603.2@101.562,100.662 cw(c101.06,100.16) RC603.2@101.77,100.16 ; v1@101.644,99.394 cw(c101.34,99.09) 101.77,99.09 ; v1@101.644,99.606 ccw(c101.34,99.91) 101.77,99.91
  Bottom Layer w0.5: pad.ICT@101.538,98.212 ccw(c101.026,98.724) 101.75,98.724 ccw(c102.474,98.724) pad.ICT@101.962,98.212 ; pad.ICT@101.75,98 v1(101.75,99.5) 101.75,99.933 QC51.3@102.532,100.715 ; 101.875,100.058 ccw(c101.218,100.715) QC51.3@102.147,100.715 ; v1@101.9,99.5 cw(c103.308,99.5) QC51.3@102.312,100.496
NetQC52_3: pad.3@46,128 QC52.3 QC53.1 RC607.2 UC65.2 | length 18.9
  Top Layer w0.5: UC65.2@41.65,132.935 v1(43.935,132.935)
  Bottom Layer w0.5: 43.875,131.872 cw(c43.218,131.215) QC52.3@44.147,131.215 ; v1@43.935,132.727 ccw(c45.866,132.727) QC52.3@44.501,131.362 ; v1@43.935,132.869 cw(c45.483,132.869) RC607.2@44.48,134.048 ; RC607.2@43.935,133.951 cw(c44.562,133.951) RC607.2@44.156,134.428 ; RC607.2@44.35,134.25 43.935,133.835 v1(43.935,132.935) 43.935,131.812 QC52.3@44.532,131.215 QC53.1@46.715,131.215 ; QC52.3@44.856,131.069 cw(c45.21,130.715) 45.21,131.215 cw(c45.21,131.715) QC52.3@44.856,131.362 ; pad.3@45.788,128.212 ccw(c45.276,128.724) 46,128.724 ccw(c46.724,128.724) pad.3@46.212,128.212 ; 46.166,131.215 ccw(c46.166,131.834) QC53.1@46.603,131.397 ; pad.3@46.25,128 46,128.25 46,130.5 QC53.1@46.75,131.25 ; QC53.1@46.543,131.25 cw(c46.043,131.25) 46.396,130.896 cw(c46.75,130.543) QC53.1@46.75,131.043
NetQC53_2: pad.2@50.5,131.25 QC53.2 RC615.1 | length 6.5
  Bottom Layer w0.5: RC615.1@48.459,132.559 cw(c48.117,132.217) 48.6,132.217 cw(c49.083,132.217) RC615.1@48.741,132.559 ; QC53.2@48.6,131.305 RC615.1@48.6,132.75 ; 48.6,131.883 ccw(c49.288,131.883) 48.802,131.397 ccw(c49.155,131.75) 49.155,131.25 ccw(c49.155,130.75) QC53.2@48.802,131.103 ; QC53.2@48.655,131.25 pad.2@50.5,131.25 ; pad.2@50.288,131.038 ccw(c49.776,130.526) 49.776,131.25 ccw(c49.776,131.974) pad.2@50.288,131.462
NetQC54_1: pad.ICT@131.25,87.75 QC54.1 RC626.1 RC630.2 | length 9.5
  Bottom Layer w0.5: QC54.1@128.25,86.25 RC626.1@131.1,86.25 ; QC54.1@128.397,86.103 cw(c128.75,85.75) 128.75,86.25 cw(c128.75,86.75) QC54.1@128.397,86.397 ; 128.855,86.25 cw(c128.855,85.255) RC630.2@129.559,85.959 ; RC630.2@129.941,85.959 cw(c130.645,85.255) 130.645,86.25 ; 130.355,86.25 cw(c130.355,85.255) RC626.1@131.059,85.959 ; pad.ICT@131.038,87.538 cw(c130.526,87.026) 131.25,87.026 cw(c131.974,87.026) pad.ICT@131.462,87.538 ; RC626.1@131.109,86.241 ccw(c130.767,86.583) 131.25,86.583 ccw(c131.733,86.583) RC626.1@131.391,86.241 ; RC626.1@131.25,86.1 pad.ICT@131.25,87.75
NetQC54_3: pad.5@126.3,87.5 QC54.3 RC620.1 RC623.2 UC67.1 | length 18
  Top Layer w0.5: UC67.1@120.983,85.353 cw(c120.385,84.755) 121.23,84.755 cw(c122.075,84.755) UC67.1@121.477,85.353 ; UC67.1@121.23,85.27 UC67.1@121.23,86 121.23,84.52 121.55,84.2 127.4,84.2 127.95,84.75 RC623.2@127.95,85.75 ; RC623.2@128.1,85.75 RC620.1@129.65,85.75
  Bottom Layer w0.5: QC54.3@126.085,85.285 QC54.3@126.218,85.285 v1@126.218,84.218 ; pad.5@126.088,87.288 cw(c125.576,86.776) 126.3,86.776 cw(c127.024,86.776) pad.5@126.512,87.288 ; v1@126.094,84.306 ccw(c125.794,84.606) 126.218,84.606 ; QC54.3@126.3,85.367 pad.5@126.3,87.5
  other v1: 126.2,84.2
NetQC55_1: pad.ICT@90,98.25 QC55.1 RC642.1 RC652.2 | length 10.5
  Bottom Layer w0.5: pad.ICT@89.788,98.462 ccw(c89.276,98.974) 90,98.974 ccw(c90.724,98.974) pad.ICT@90.212,98.462 ; RC642.1@89.859,99.759 cw(c89.517,99.417) 90,99.417 cw(c90.483,99.417) RC642.1@90.141,99.759 ; pad.ICT@90,98.25 RC642.1@90,99.9 90.15,99.75 QC55.1@93.75,99.75 ; RC642.1@90.191,100.041 ccw(c90.895,100.745) 90.895,99.75 ; 91.355,99.75 ccw(c91.355,100.745) RC652.2@92.059,100.041 ; RC652.2@92.441,100.041 ccw(c93.145,100.745) 93.145,99.75 ; QC55.1@93.603,99.603 ccw(c93.25,99.25) 93.25,99.75 ccw(c93.25,100.25) QC55.1@93.603,99.897
NetQC55_3: pad.ICT@96.27,98 QC55.3 RC637.1 RC640.2 UC70.1 | length 13.7
  Top Layer w0.5: RC640.2@94.35,100.5 RC637.1@95.9,100.5 96.27,100.13 UC70.1@96.27,98 ; RC640.2@94.491,100.359 cw(c94.833,100.017) 94.833,100.5 cw(c94.833,100.983) RC640.2@94.491,100.641 ; RC637.1@95.759,100.309 cw(c94.524,99.074) 96.27,99.074 ; RC637.1@95.759,100.359 ccw(c95.417,100.017) 95.417,100.5 ccw(c95.417,100.983) RC637.1@95.759,100.641 ; UC70.1@96.023,98.647 ccw(c95.425,99.245) 96.27,99.245 ccw(c97.115,99.245) UC70.1@96.517,98.647
  Bottom Layer w0.5: QC55.3@95.782,100.715 96.27,100.227 v1(96.27,99.5) pad.ICT@96.27,98 ; QC55.3@95.813,100.569 cw(c94.711,99.466) v1@96.27,99.466 ; pad.ICT@96.058,98.212 ccw(c95.546,98.724) 96.27,98.724 ccw(c96.994,98.724) pad.ICT@96.482,98.212
NetQC56_1: pad.ICT@116.75,85.25 QC56.1 RC643.1 RC651.2 | length 13.2
  Bottom Layer w0.5: QC56.1@112.397,86.397 ccw(c113.112,87.112) 113.112,86.1 ; QC56.1@112.4,86.1 RC643.1@115.25,86.1 115.9,86.1 pad.ICT@116.75,85.25 ; RC651.2@113.559,85.959 ccw(c113.217,85.617) 113.217,86.1 ccw(c113.217,86.583) RC651.2@113.559,86.241 ; RC651.2@113.941,85.959 cw(c114.283,85.617) 114.283,86.1 cw(c114.283,86.583) RC651.2@113.941,86.241 ; RC643.1@115.059,85.959 ccw(c114.717,85.617) 114.717,86.1 ccw(c114.717,86.583) RC643.1@115.059,86.241 ; RC643.1@115.161,86.366 cw(c115.382,85.943) RC643.1@115.719,86.281 ; RC643.1@115.3,85.9 cw(c115.3,83.969) pad.ICT@116.666,85.334 ; RC643.1@115.3,86.4 cw(c115.3,85.676) 115.812,86.188 ; RC643.1@115.393,85.923 cw(c115.713,85.313) 116.2,85.8 ; RC643.1@115.441,85.959 cw(c115.783,85.617) 115.783,86.1 cw(c115.783,86.583) RC643.1@115.441,86.241 ; pad.ICT@116.45,85.25 ccw(c115.726,85.25) 116.238,85.762 ccw(c116.75,86.274) pad.ICT@116.75,85.55
NetQC56_3: pad.ICT@104.4,86.1 QC56.3 RC638.1 RC641.2 UC71.1 | length 15.9
  Top Layer w0.5: v1(108.75,86.25) UC71.1@110.23,86.25 ; v1@109.023,86.25 ccw(c109.023,87.607) UC71.1@109.983,86.647
  Bottom Layer w0.5: pad.ICT@104.4,86.1 RC641.2@106,86.1 RC641.2@106.15,86.1 ; pad.ICT@104.612,85.888 cw(c105.124,85.376) 105.124,86.1 cw(c105.124,86.824) pad.ICT@104.612,86.312 ; RC641.2@105.809,85.959 ccw(c105.467,85.617) 105.467,86.1 ccw(c105.467,86.583) RC641.2@105.809,86.241 ; RC641.2@106.15,86.25 v1(108.75,86.25) 109.253,86.25 QC56.3@110.218,85.285 ; RC641.2@106.191,85.959 cw(c106.895,85.255) 106.895,86.25 ; 106.605,86.25 cw(c106.605,85.255) RC638.1@107.309,85.959 ; RC638.1@107.691,85.959 cw(c108.395,85.255) v1@108.395,86.25 ; v1@108.815,86.115 cw(c109.078,85.572) 109.504,85.999 ; v1@108.9,86.1 108.75,86.1 cw(c108.75,84.524) QC56.3@109.864,85.638 ; 109.561,85.942 cw(c108.904,85.285) QC56.3@109.833,85.285
NetRA113_2: pad.ICT@49.5,94.75 RA113.2 RA116.1 UA10.5 | length 19.6
  Top Layer w0.5: v1(48.75,93) 48.75,94.75 ; 48.75,94.25 49,94.5 ; 49.262,99.762 cw(c49.595,99.429) UA10.5@49.595,99.9 ; UA10.5@49.595,100.5 49.595,100.095 48.75,99.25 48.75,94.75 ; 51.011,94.761 ccw(c50.072,95.7) RA116.1@51.4,95.7 ; RA116.1@51.741,95.609 cw(c52.083,95.267) 52.083,95.75 cw(c52.083,96.233) RA116.1@51.741,95.891 ; RA113.2@53.009,95.609 ccw(c52.667,95.267) 52.667,95.75 ccw(c52.667,96.233) RA113.2@53.009,95.891 ; RA113.2@53.15,95.75 RA116.1@51.6,95.75 51.6,95.35 50.75,94.5 49,94.5 ; 48.75,94.75 49,94.5
  Bottom Layer w0.5: v1(48.75,93) 48.75,94 pad.ICT@49.5,94.75 ; pad.ICT@49.2,94.75 cw(c48.476,94.75) 48.988,94.238 cw(c49.5,93.726) pad.ICT@49.5,94.45
NetRA115_1: pad.ICT@53.5,109.25 RA115.1 RA117.2 UA10.4 | length 13.6
  Top Layer w0.5: UA10.4@49.595,106 49.595,106.845 50.75,108 RA115.1@51.9,108 52.25,108.35 v1(52.25,109.75) ; UA10.4@49.65,106.545 cw(c50.507,106.545) 49.901,107.151 ; 49.77,107.02 ccw(c48.853,107.937) RA117.2@50.15,107.948 ; RA117.2@50.491,107.859 cw(c50.833,107.517) 50.833,108 cw(c50.833,108.483) RA117.2@50.491,108.141 ; RA115.1@51.759,107.859 ccw(c51.417,107.517) 51.417,108 ccw(c51.417,108.483) RA115.1@51.759,108.141 ; RA115.1@51.759,108.191 ccw(c50.572,109.378) v1@52.25,109.378
  Bottom Layer w0.5: 53.031,109.75 cw(c53.031,109.034) pad.ICT@53.682,109.334 ; pad.ICT@53.228,109.124 ccw(c52.25,108.673) v1(52.25,109.75) 53,109.75 pad.ICT@53.5,109.25
NetRA124_2: pad.ICT@8.75,41.25 RA124.2 RA128.1 | length 3.9
  Top Layer w1: RA128.1@8.75,41.1 RA124.2@8.75,43.8
  Bottom Layer w1: pad.ICT@8.75,41.25 v1(8.75,42.5)
NetRA125_2: RA125.2 RA130.1 | length 2.4
  Top Layer w1: RA125.2@19.7,20.85 RA130.1@19.7,23.25
NetRA128_2: pad.ICT@8.75,35.45 RA128.2 RA135.1 | length 4.2
  Top Layer w1: RA135.1@8.75,35.45 RA128.2@8.75,38.15
  Bottom Layer w1: pad.ICT@8.75,35.45 v1(8.75,37)
NetRA130_2: RA130.2 RA136.1 | length 3.9
  Top Layer w1: RA136.1@16.45,20.75 16.45,22.9 RA130.2@16.8,23.25 ; 16.45,21.793 cw(c18.007,21.793) RA130.2@16.906,22.894
NetRA133_2: pad.ICT@98.65,52.65 RA133.2 RA138.2 UA11.5 | length 13.3
  Top Layer w0.5: 97.5,55.104 ccw(c98.204,55.104) v1@97.706,54.606 ; 97.762,58.512 cw(c98.095,58.179) UA11.5@98.095,58.65 ; UA11.5@98.095,59.25 98.095,58.845 97.5,58.25 97.5,54.6 v1(97.6,54.5) RA138.2@98.65,54.5 ; RA138.2@98.509,54.359 ccw(c98.167,54.017) 98.167,54.5 ccw(c98.167,54.983) RA138.2@98.509,54.641
  Bottom Layer w0.5: v1(97.6,54.5) RA133.2@98.65,54.5 pad.ICT@98.65,52.65 ; pad.ICT@98.438,52.862 ccw(c97.926,53.374) 98.65,53.374 ccw(c99.374,53.374) pad.ICT@98.862,52.862 ; RA133.2@98.509,54.309 cw(c98.167,53.967) 98.65,53.967 cw(c99.133,53.967) RA133.2@98.791,54.309 ; RA133.2@98.509,54.359 ccw(c98.167,54.017) 98.167,54.5 ccw(c98.167,54.983) RA133.2@98.509,54.641
NetRA134_1: pad.ICT@98.9,71.15 RA134.1 RA140.2 UA11.4 | length 10.6
  Top Layer w0.5: UA11.4@98.095,64.75 98.095,66.195 RA140.2@98.9,67 RA134.1@98.9,68.5 v1(98.9,69.9) ; RA140.2@98.473,66.573 cw(c98.9,66.146) RA140.2@98.9,66.75 ; RA140.2@98.759,67.191 ccw(c98.417,67.533) 98.9,67.533 ccw(c99.383,67.533) RA140.2@99.041,67.191 ; RA134.1@98.759,68.309 cw(c98.417,67.967) 98.9,67.967 cw(c99.383,67.967) RA134.1@99.041,68.309 ; RA134.1@98.759,68.691 ccw(c98.417,69.033) 98.9,69.033 ccw(c99.383,69.033) RA134.1@99.041,68.691
  Bottom Layer w0.5: pad.ICT@98.688,70.938 cw(c98.176,70.426) 98.9,70.426 cw(c99.624,70.426) pad.ICT@99.112,70.938 ; v1(98.9,69.9) pad.ICT@98.9,71.15
NetRA135_2: RA135.2 RA139.1 | length 1.9
  Top Layer w1: RA139.1@8.75,30.7 RA135.2@8.75,32.55
NetRA136_2: RA136.2 RA141.1 | length 2.1
  Top Layer w1: RA141.1@11.45,20.75 RA136.2@13.55,20.75
NetRA139_2: RA139.2 RA142.2 | length 1.8
  Top Layer w1: RA142.2@8.75,25.95 RA139.2@8.75,27.8
NetRA141_2: RA141.2 RA142.1 | length 2.1
  Top Layer w1: RA141.2@8.55,20.75 RA142.1@8.55,22.85
NetRA155_2: pad.ICT@34.8,98.3 RA155.2 ZDA1.1 | length 9.1
  Bottom Layer w0.5: ZDA1.1@32.732,100.432 cw(c32.084,99.784) 33,99.784 ; RA155.2@32.859,98.491 ccw(c32.517,98.833) 33,98.833 ccw(c33.483,98.833) RA155.2@33.141,98.491 ; 33,99.543 cw(c34.257,99.543) ZDA1.1@33.368,100.432 ; ZDA1.1@33,100.45 RA155.2@33,98.35 pad.ICT@34.55,98.35 ; RA155.2@33.191,98.209 cw(c33.533,97.867) 33.533,98.35 cw(c33.533,98.833) RA155.2@33.191,98.491 ; 33.955,98.35 cw(c33.955,97.455) 34.588,98.088 ccw(c33.955,97.455) 33.955,98.35 ; 34.196,98.35 ccw(c34.196,98.904) 34.588,98.512 cw(c34.196,98.904) 34.196,98.35
NetRA157_2: pad.ICT@44.25,67.5 RA157.2 RA171.1 UA13.1 UA13.6 | length 18.9
  Top Layer w0.5: UA13.1@35.4,72.655 36.845,72.655 37.75,71.75 37.75,70.615 38.25,70.115 UA13.6@40.6,70.115 42.135,70.115 42.6,69.65 v1(42.6,68) RA157.2@41.6,67 ; RA157.2@41.6,67.25 ccw(c41.6,67.854) RA157.2@42.027,67.427
  Bottom Layer w0.5: RA171.1@41.6,67 v1(42.6,68) ; RA171.1@41.6,67.25 ccw(c41.6,67.854) RA171.1@42.027,67.427 ; 43.631,68 cw(c43.631,67.012) pad.ICT@44.407,67.624 ; pad.ICT@44.014,67.314 ccw(c42.6,66.199) v1(42.6,68) ; pad.ICT@44.25,67.5 43.75,68 v1(42.6,68)
NetRA158_1: pad.ICT@33.9,89.4 RA158.1 RA159.1 RA160.1 RA168.2 UA14.1 | length 17.7
  Top Layer w0.5: v1(32.77,90.25) UA14.1@32.77,92.65
  Bottom Layer w0.5: RA168.2@32.35,91.25 RA168.2@32.475,91.375 ; v1(32.77,90.25) 32.77,90.75 ; 33.25,91.5 32.77,91.02 32.77,90.75 ; RA160.1@33.759,91.309 cw(c33.417,90.967) 33.9,90.967 cw(c34.383,90.967) RA160.1@34.041,91.309 ; RA160.1@33.759,91.691 ccw(c33.417,92.033) 33.9,92.033 ccw(c34.383,92.033) RA160.1@34.041,91.691 ; RA158.1@33.759,92.809 cw(c33.417,92.467) 33.9,92.467 cw(c34.383,92.467) RA158.1@34.041,92.809 ; RA158.1@33.759,93.191 ccw(c33.417,93.533) 33.9,93.533 ccw(c34.383,93.533) RA158.1@34.041,93.191 ; RA159.1@33.759,94.309 cw(c33.417,93.967) 33.9,93.967 cw(c34.383,93.967) RA159.1@34.041,94.309 ; pad.ICT@33.9,89.4 RA160.1@33.9,91.5 ; RA159.1@33.9,94.5 RA158.1@33.9,93 RA160.1@33.9,91.5 ; 32.77,90.75 32.77,91.08 RA168.2@32.35,91.5 RA160.1@33.9,91.5 ; 33.9,90.124 cw(c33.176,90.124) 33.688,89.612 ccw(c33.176,90.124) 33.9,90.124 ; 33.9,90.124 ccw(c34.624,90.124) 34.112,89.612 cw(c34.624,90.124) 33.9,90.124
NetRA161_1: pad.ICT@42.647,64.103 RA161.1 RA162.2 | length 9
  Top Layer w0.5: RA161.1@40.1,63.75 41,63.75 41.6,64.35 RA162.2@41.6,65.5 ; RA161.1@40.138,63.75 ccw(c40.138,65.319) 41.247,64.21 ccw(c40.396,65.061) RA162.2@41.6,65.061 ; RA161.1@40.241,63.609 cw(c40.583,63.267) 40.583,63.75 cw(c40.583,64.233) RA161.1@40.241,63.891 ; RA162.2@41.459,65.309 cw(c41.117,64.967) 41.6,64.967 cw(c42.083,64.967) RA162.2@41.741,65.309
  Bottom Layer w0.5: v1(41.353,64.103) pad.ICT@42.647,64.103 ; pad.ICT@42.434,63.891 ccw(c41.922,63.379) 41.922,64.103 ccw(c41.922,64.828) pad.ICT@42.434,64.316
NetRA170_1: pad.ICT@27,103.25 RA170.1 RA180.2 | length 8.2
  Top Layer w0.5: RA180.2@28.15,100 28.15,101.9 v1(29,102.75)
  Bottom Layer w0.5: pad.ICT@26.859,103.109 ccw(c27.724,103.974) 27.724,102.75 ; pad.ICT@27,103.25 27.5,102.75 v1(29,102.75) ; pad.ICT@27.212,103.462 ccw(c28.931,105.181) v1@28.931,102.75
NetRA172_1: pad.ICT@11.45,25.95 RA172.1 RA175.2 | length 4.6
  Bottom Layer w1: RA172.1@8.75,27.8 RA175.2@8.75,25.95 pad.ICT@11.45,25.95
NetRA173_1: pad.ICT@19.8,18.25 RA173.1 RA174.1 | length 4.9
  Bottom Layer w1: RA173.1@19.7,20.85 RA174.1@19.7,23.25 ; pad.ICT@19.8,18.25 RA173.1@19.8,20.75
NetRA174_2: pad.ICT@16.8,25.45 RA174.2 RA177.1 | length 6.1
  Bottom Layer w1: RA177.1@16.45,20.75 16.45,22.9 RA174.2@16.8,23.25 pad.ICT@16.8,25.45 ; 16.45,21.793 cw(c18.007,21.793) RA174.2@16.906,22.894
NetRA175_1: pad.ICT@6.75,23 RA175.1 RA176.1 | length 4.1
  Bottom Layer w1: pad.ICT@6.75,23 RA175.1@8.7,23 ; RA176.1@8.55,20.75 RA175.1@8.55,22.85
NetRA176_2: pad.ICT@13.55,23 RA176.2 RA177.2 | length 4.3
  Bottom Layer w1: RA176.2@11.45,20.75 RA177.2@13.55,20.75 pad.ICT@13.55,23
NetRA198_1: pad.ICT@39,89 RA198.1 RA200.1 RA204.2 UA20.1 | length 30.1
  Top Layer w0.5: RA204.2@35.5,91.15 35.9,90.75 40,90.75 ; UA20.1@40.273,92.297 ccw(c39.675,92.895) 40.52,92.895 ccw(c41.365,92.895) UA20.1@40.767,92.297 ; v1(40.52,89.27) 40.52,91.55 ; 40.52,90.23 40,90.75 ; 40.52,90.75 40,90.75 ; 40.52,91.27 40,90.75 ; UA20.1@40.52,92.27 40.52,91.55 ; UA20.1@40.52,92.65 40.52,92.77 41.1,93.35 42.65,93.35 v1(42.75,93.25) ; UA20.1@40.52,92.98 40.52,91.55 ; 42.146,93.35 cw(c42.146,92.646) v1@42.644,93.144
  Bottom Layer w0.5: pad.ICT@39,89 39.27,89.27 v1(40.52,89.27) ; pad.ICT@39.212,88.788 cw(c40.376,87.624) v1@40.376,89.27 ; RA200.1@43.472,93.25 ccw(c43.472,93.967) RA200.1@44.144,93.715 ; RA200.1@43.676,93.891 cw(c42.75,94.239) v1(42.75,93.25) 43.3,93.25 RA200.1@44.05,94 RA198.1@44.05,96.25 ; RA200.1@43.767,94.533 ccw(c43.084,95.216) 44.05,95.216 ccw(c45.016,95.216) RA200.1@44.333,94.533 ; RA198.1@43.767,95.717 cw(c43.084,95.034) 44.05,95.034 cw(c45.016,95.034) RA198.1@44.333,95.717 ; v1@42.75,93.4 ccw(c42.75,95.09) 43.945,93.895 cw(c42.75,95.09) v1@42.75,93.4
NetRAC1_1: RAC1.1 UC73.6 | length 5.7
  Top Layer w0.25: RAC1.1@86.55,173.55 87.8,173.55 88.5,174.25 89.525,174.25 UC73.6@91.45,174.25 ; RAC1.1@86.788,173.462 cw(c87.002,173.248) 87.002,173.55 cw(c87.002,173.852) RAC1.1@86.788,173.638
NetRAC1_2: RAC1.2 UC73.5 | length 5.5
  Top Layer w0.25: RAC1.2@86.55,174.35 87.85,174.35 88.25,174.75 UC73.5@91.45,174.75 ; RAC1.2@86.788,174.262 cw(c87.002,174.048) 87.002,174.35 cw(c87.002,174.652) RAC1.2@86.788,174.438
NetRAC1_3: RAC1.3 UC73.4 | length 7.1
  Top Layer w0.25: RAC1.3@86.65,175.25 89.5,175.25 ; RAC1.3@86.788,175.062 cw(c87.243,174.607) 87.243,175.25 ; 87.725,175.25 89.5,175.25 ; UC73.4@91.45,175.25 89.5,175.25
NetRAC1_4: pad.ICT@90.5,176 RAC1.4 UC73.1 | length 16
  Top Layer w0.25: RAC1.4@86.6,176 v1(87.75,176) ; RAC1.4@86.788,175.862 cw(c87.122,175.528) 87.122,176 ; v1@87.556,175.806 ccw(c87.086,175.336) 87.086,176 ccw(c87.086,176.664) v1@87.556,176.194 ; UC73.1@91.45,176.75 v1(93,176.75) ; v1@92.806,176.556 ccw(c92.336,176.086) 92.336,176.75 ccw(c92.336,177.414) v1@92.806,176.944
  Bottom Layer w0.25: v1(87.75,176) 92.25,176 v1(93,176.75) ; v1@87.944,175.806 cw(c88.414,175.336) 88.414,176 cw(c88.414,176.664) v1@87.944,176.194 ; pad.ICT@90.199,175.699 ccw(c89.474,174.974) 89.474,176 ccw(c89.474,177.026) pad.ICT@90.199,176.301 ; pad.ICT@90.801,175.699 cw(c91.526,174.974) 91.526,176 cw(c91.526,177.026) pad.ICT@90.801,176.301 ; v1@92.725,176.75 cw(c92.061,176.75) 92.531,176.281 cw(c93,175.811) v1@93,176.475
NetRAC2_1: RAC2.1 UC73.47 | length 8
  Top Layer w0.25: v1(102.5,169.25) 102.525,169.25 103.525,170.25 UC73.47@104.55,170.25 UC73.47@104.565,170.25 ; v1@102.5,169.525 ccw(c102.5,170.25) 103.013,169.737 ; v1@102.775,169.25 cw(c103.378,169.25) 102.952,169.676 ; 103.288,170.013 cw(c103.8,169.501) UC73.47@103.8,170.225 ; 103.388,170.113 cw(c103.691,169.809) UC73.47@103.794,170.226
  Bottom Layer w0.25: v1(102.5,169.25) 102.525,169.25 103.075,169.8 RAC2.1@104.2,169.8 ; v1@102.5,169.525 ccw(c102.5,170.25) 103.013,169.737 ; v1@102.775,169.25 cw(c103.378,169.25) 102.952,169.676 ; RAC2.1@103.962,169.712 ccw(c103.748,169.498) 103.748,169.8 ccw(c103.748,170.102) RAC2.1@103.962,169.888
NetRAC2_2: RAC2.2 UC73.48 | length 5.6
  Top Layer w0.25: v1(102.5,170.25) 102.525,170.25 103.025,170.75 UC73.48@104.55,170.75 ; v1@102.5,170.525 ccw(c102.5,171.25) 103.013,170.737 ; v1@102.775,170.25 cw(c103.378,170.25) 102.952,170.676
  Bottom Layer w0.25: v1(102.5,170.25) 102.525,170.25 102.875,170.6 RAC2.2@104.2,170.6 ; RAC2.2@103.962,170.512 ccw(c103.748,170.298) 103.748,170.6 ccw(c103.748,170.902) RAC2.2@103.962,170.688
NetRAC2_3: RAC2.3 UC73.49 | length 5.7
  Top Layer w0.25: v1(102.5,171.25) UC73.49@104.55,171.25
  Bottom Layer w0.25: v1(102.5,171.25) 102.65,171.4 RAC2.3@104.2,171.4 ; v1@102.518,171.232 cw(c102.922,170.828) 102.922,171.4 ; v1@102.694,171.056 cw(c103.526,170.224) 103.526,171.4 ; RAC2.3@103.962,171.312 ccw(c103.748,171.098) 103.748,171.4 ccw(c103.748,171.702) RAC2.3@103.962,171.488
NetRAC2_4: RAC2.4 UC73.50 | length 6.4
  Top Layer w0.25: v1@102.5,171.975 cw(c102.5,171.25) 103.013,171.763 ; v1(102.5,172.25) 102.525,172.25 103.025,171.75 UC73.50@104.55,171.75 UC73.50@104.565,171.75 ; v1@102.775,172.25 ccw(c103.378,172.25) 102.952,171.824
  Bottom Layer w0.25: v1(102.5,172.25) RAC2.4@104.15,172.25 ; v1@102.694,172.056 cw(c103.164,171.586) 103.164,172.25 cw(c103.164,172.914) v1@102.694,172.444 ; 103.628,172.25 cw(c103.628,171.778) RAC2.4@103.962,172.112
NetRC3_1: pad.ICT@58.209,123.041 RC3.1 UC627.6 UC627.7 | length 21.1
  Top Layer w0.25: v1@56.975,123.25 cw(c56.311,123.25) 56.781,122.781 cw(c57.25,122.311) v1@57.25,122.975 ; v1(57.25,123.25) 56.75,122.75 56.75,118.5 57.75,117.5 59.75,117.5 ; 60.35,117.5 60,117.5 ; 60.35,117.85 60,117.5 ; 59.75,117.5 60,117.5 ; 59.75,117.5 60,117.5
  Top Layer w0.5: RC3.1@60.209,118.309 cw(c59.867,117.967) 60.35,117.967 cw(c60.833,117.967) RC3.1@60.491,118.309 ; RC3.1@60.35,118.5 60.35,117.5 60.35,117.4 61.29,116.46 UC627.6@63.15,116.46 UC627.7@63.15,115.19
  Bottom Layer w0.25: v1@57.444,123.056 cw(c57.914,122.586) 57.914,123.25 cw(c57.914,123.914) v1@57.444,123.444 ; v1@57.628,123.25 cw(c57.628,122.794) pad.ICT@58.048,122.973 ; 57.686,123.25 ccw(c57.686,123.564) pad.ICT@57.908,123.342 ; pad.ICT@57.818,122.875 ccw(c57.25,122.633) v1(57.25,123.25) 58,123.25 pad.ICT@58.5,122.75
NetRC7_2: pad.ICT@68.75,119.5 RC7.2 RC8.1 UC627.5 UC627.10 | length 16.1
  Top Layer w0.5: UC627.5@63.15,117.73 UC627.10@68.35,117.73 v1(69.98,117.73)
  Bottom Layer w0.25: pad.ICT@68.449,119.199 cw(c67.724,118.474) 68.75,118.474 cw(c69.776,118.474) pad.ICT@69.051,119.199 ; RC8.1@68.62,118.03 ccw(c68.307,118.343) 68.75,118.343 ; RC8.1@68.75,117.85 pad.ICT@68.75,119.5 ; 68.75,118.826 ccw(c69.876,118.826) RC8.1@69.08,118.03 ; RC8.1@68.85,117.75 RC8.1@68.85,117.9
  Bottom Layer w0.5: RC7.2@68.709,116.441 ccw(c68.367,116.783) 68.85,116.783 ccw(c69.333,116.783) RC7.2@68.991,116.441 ; RC8.1@68.709,117.559 cw(c68.367,117.217) 68.85,117.217 cw(c69.333,117.217) RC8.1@68.991,117.559 ; RC7.2@68.85,116.25 RC8.1@68.85,117.75 68.87,117.73 v1(69.98,117.73) ; RC8.1@68.991,117.891 ccw(c69.381,118.281) 69.381,117.73
NetRC14_1: pad.ICT@77.5,115.25 RC14.1 UC627.8 UC627.9 | length 18.9
  Top Layer w0.25: RC14.1@71.15,115.625 cw(c71.15,114.72) 71.79,115.36 ; RC14.1@71.15,116 72.65,114.5 75.5,114.5 v1(76.5,115.5) ; RC14.1@71.475,115.95 ccw(c72.139,115.95) 71.669,115.481 ; v1@76.225,115.5 cw(c75.561,115.5) 76.031,115.031 cw(c76.5,114.561) v1@76.5,115.225
  Top Layer w0.5: UC627.8@68.35,115.19 UC627.9@68.35,116.46 70.69,116.46 RC14.1@71.15,116 ; 69.677,116.46 cw(c69.677,114.577) RC14.1@71.009,115.909 ; RC14.1@70.723,116.427 ccw(c71.15,116.854) RC14.1@71.15,116.25 ; RC14.1@70.884,116.46 cw(c70.884,115.784) RC14.1@71.362,116.262
  Bottom Layer w0.25: v1@76.694,115.306 cw(c77.164,114.836) 77.164,115.5 cw(c77.164,116.164) v1@76.694,115.694 ; v1@76.87,115.5 cw(c76.87,114.996) pad.ICT@77.338,115.185 ; pad.ICT@77.106,115.091 ccw(c76.5,114.847) v1(76.5,115.5) 77.25,115.5 pad.ICT@77.5,115.25